# Altium PCB Test_PCB.PcbDoc
Units mil, origin at the board's own origin, x right, y up, seen from the top; angles counter-clockwise.
Board outline 3500 x 3975 mil, 2 copper layers (Top Layer, Bottom Layer); 44 components, 34 nets, 150 pads, 6 vias.
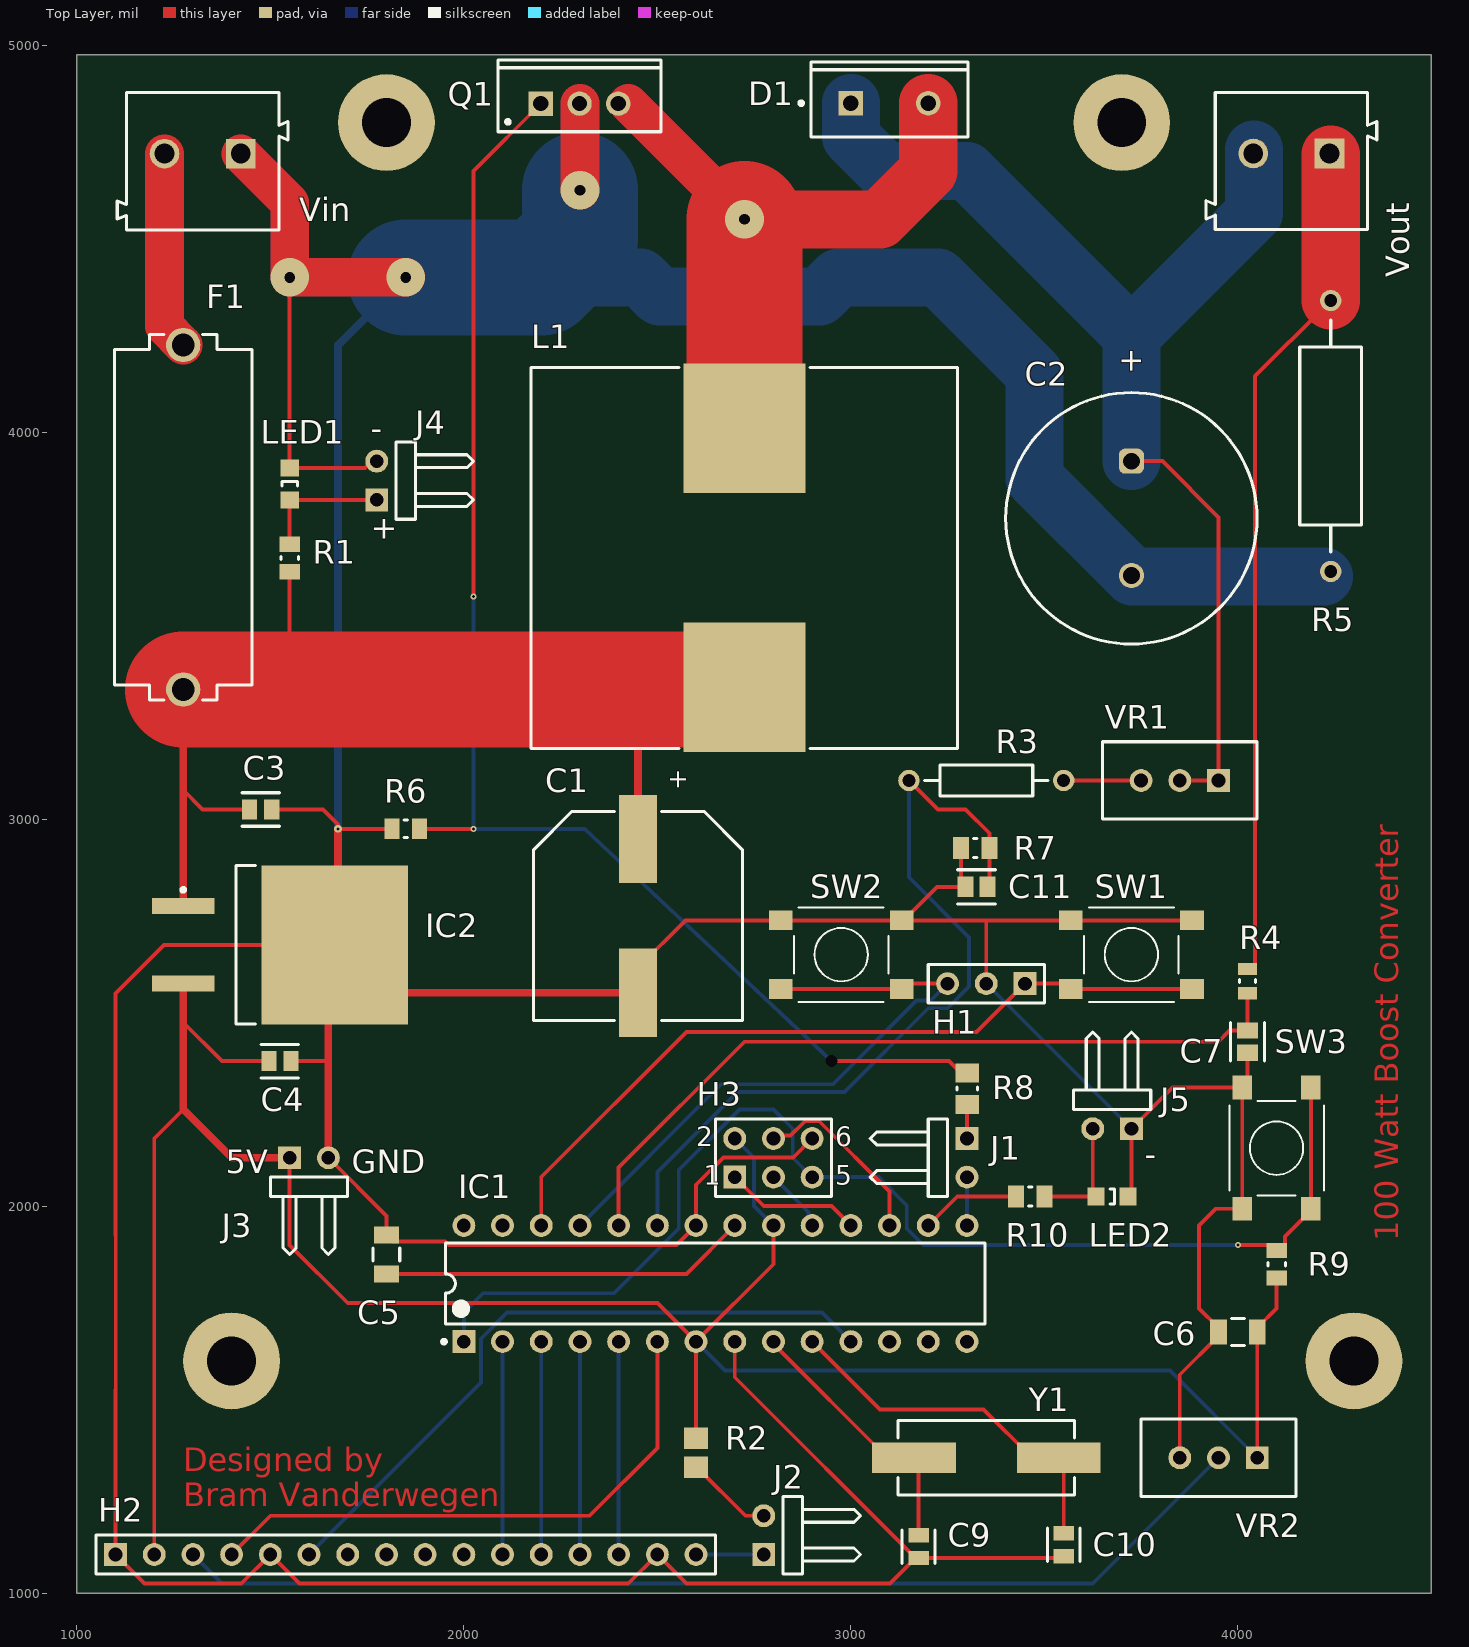
[diagram p0: Top Layer view]
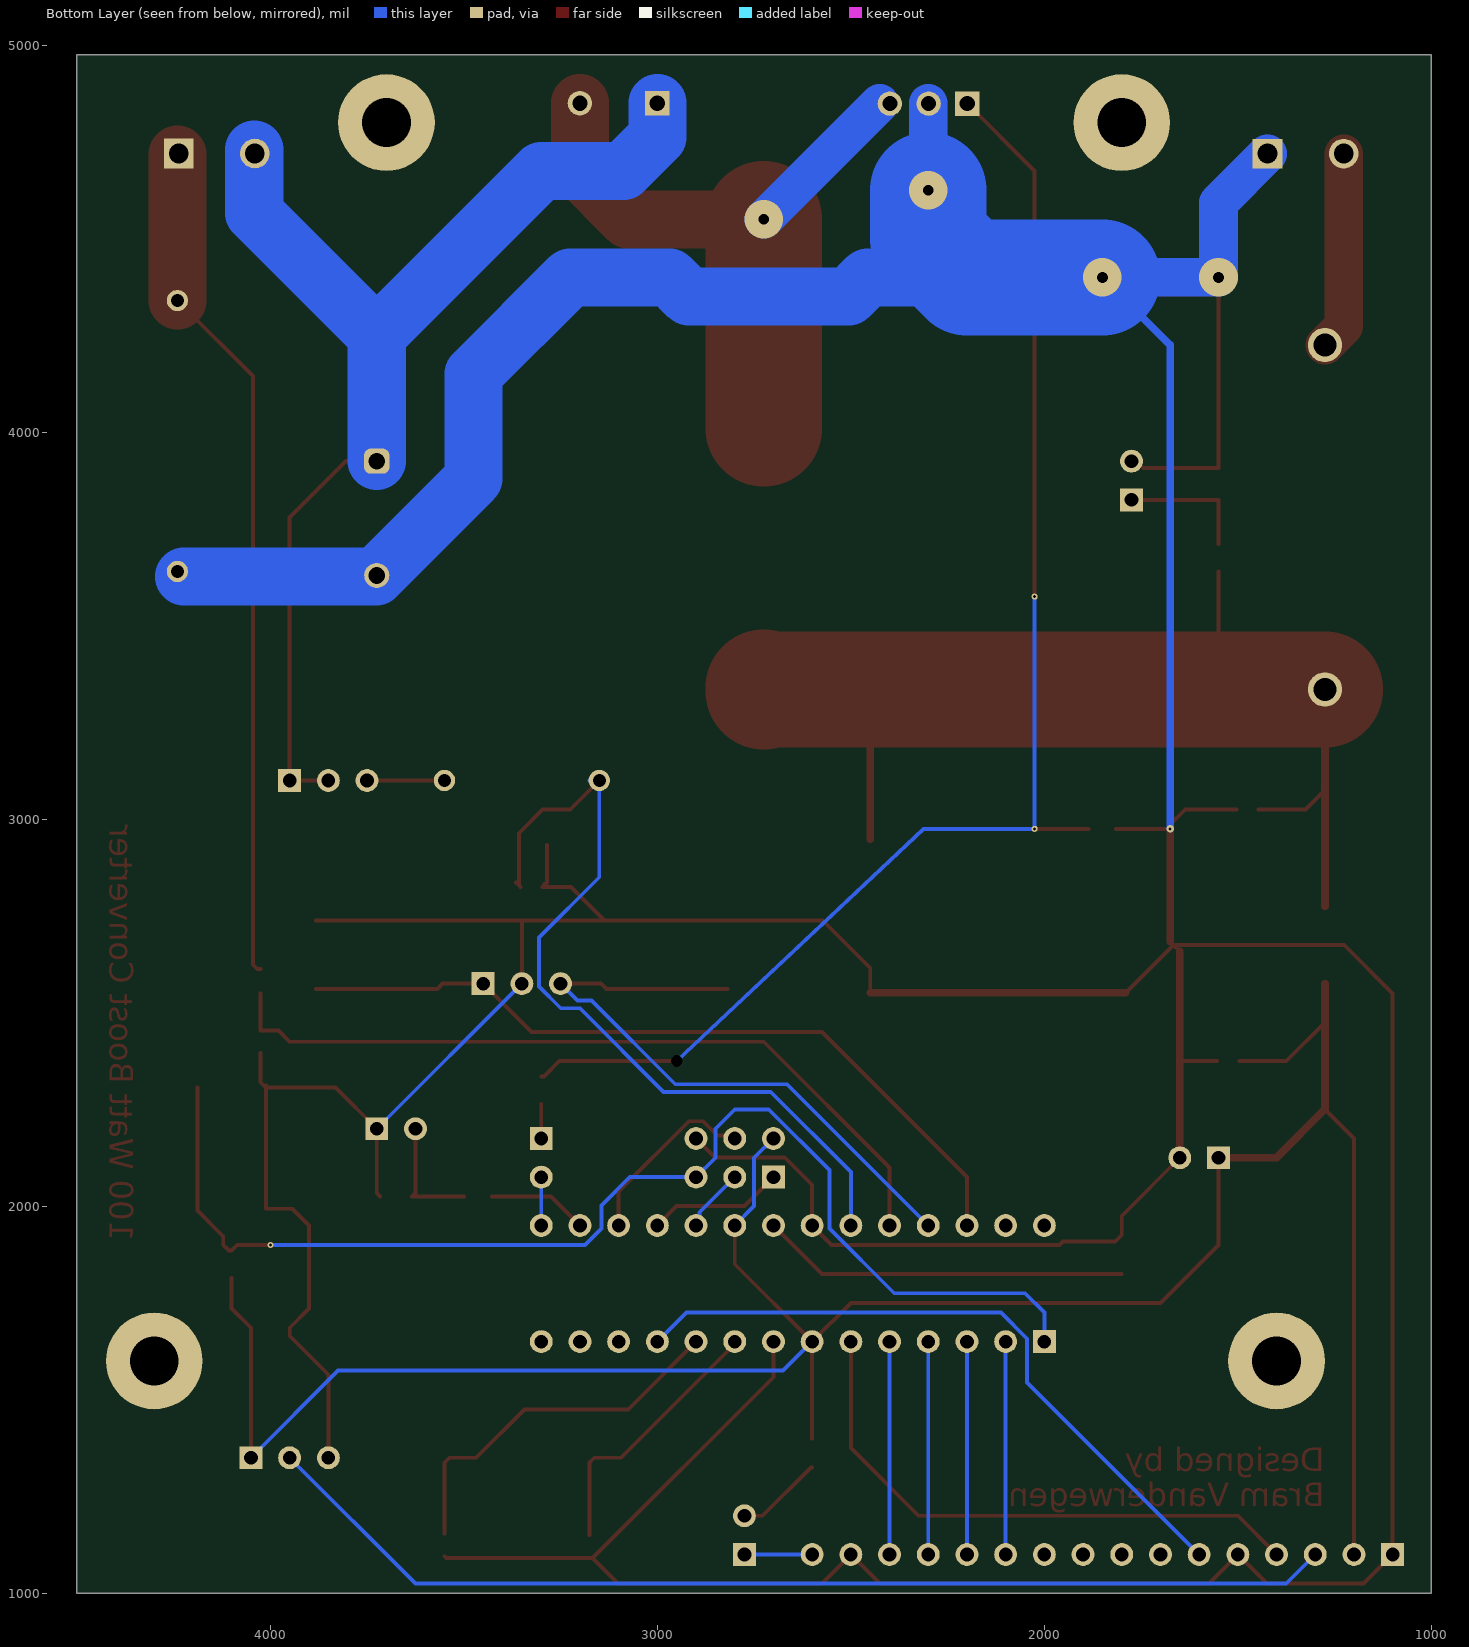
[diagram p1: Bottom Layer view, seen from below]
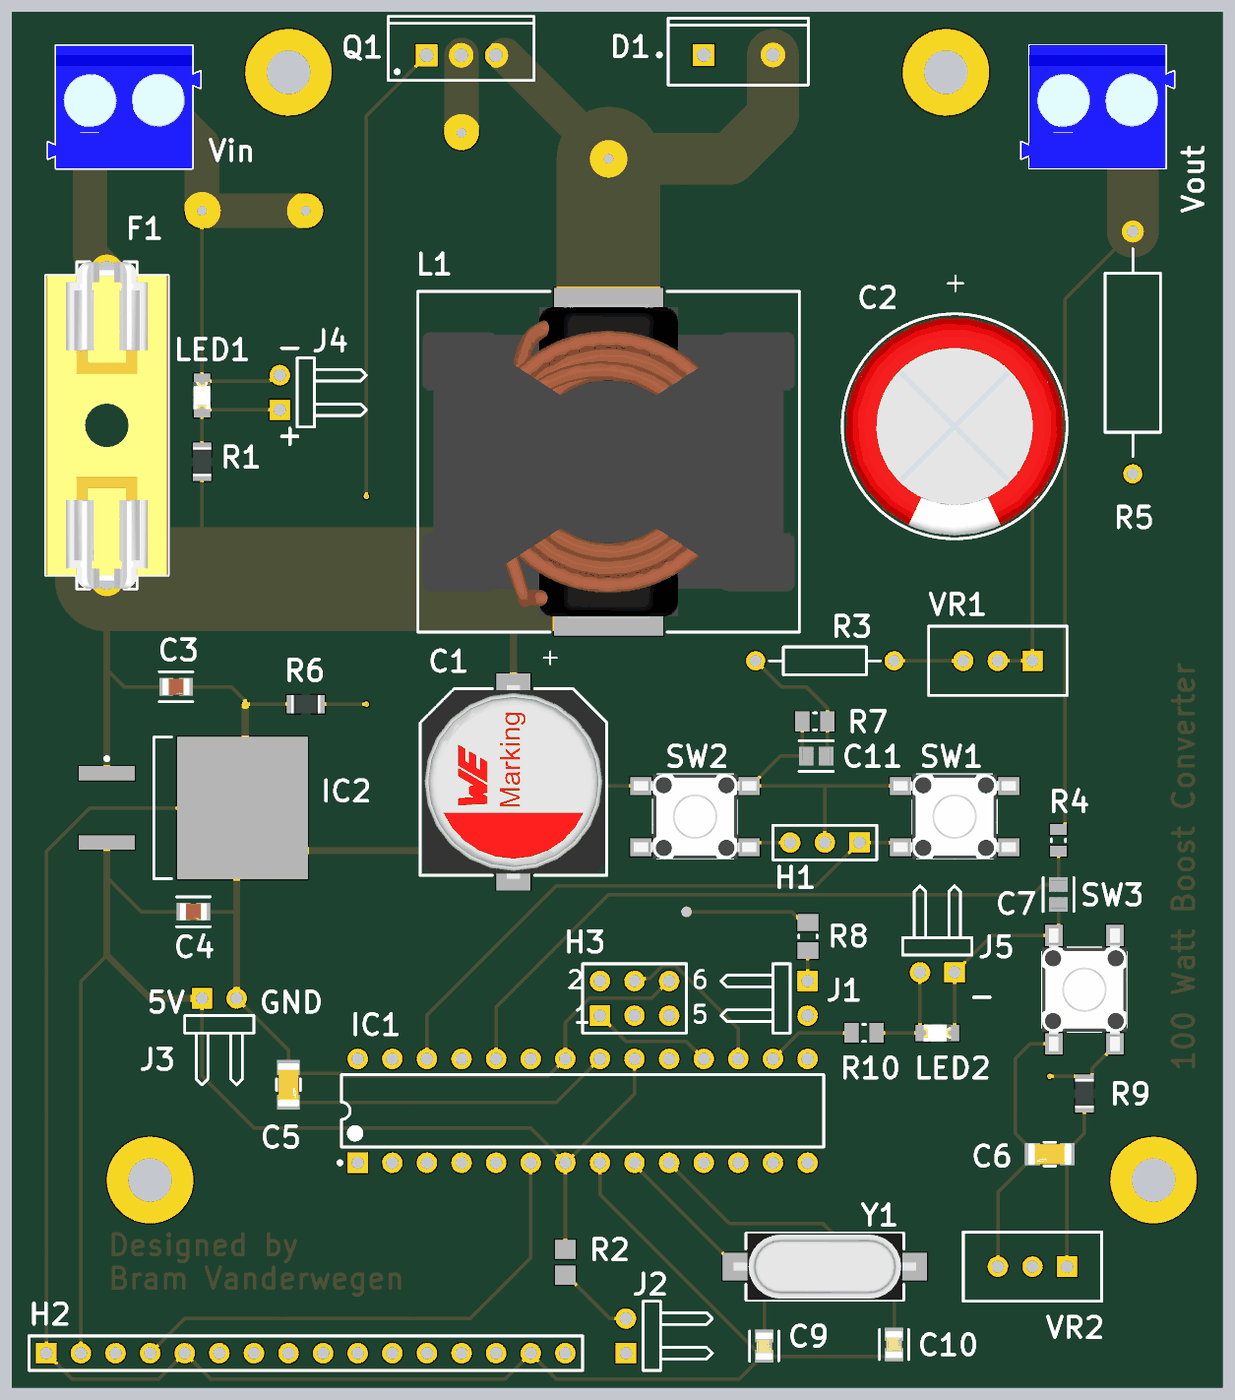
[diagram p2: 3D render of the assembled board from above, using the file's embedded part models]

## Layer stack, top to bottom
Top Solder: solder mask 0.4, Solder Resist, Dk 3.5
Top Layer: signal copper 1.4
Dielectric 1: dielectric 12.6, FR-4, Dk 4.8
Bottom Layer: signal copper 1.4
Bottom Solder: solder mask 0.4, Solder Resist, Dk 3.5

## Board outline
1000,4975 4500,4975 4500,1000 1000,1000

## Design rules (kind name [scope] priority, off if disabled: settings)
Clearance [All] p1: gap=10 ignorepadtopadclearanceinfootprint=FALSE except(0: Arc-Hole Track-Hole SMDPad-Hole THPad-Hole Via-Hole Fill-Hole Poly-Hole Region-Hole Text-Hole)
Height [All] p1: minheight=0 maxheight=10000 prefheight=500
HoleSize [All] p1: absolutevalues=TRUE maxlimit=196.85 minlimit=1 maxpercent=80.000 minpercent=20.000
PolygonConnect [All] p1: connectstyle=Relief reliefconductorwidth=10 reliefentries=4 polygonreliefangle="90 Angle" airgapwidth=10
RoomDefinition Boost_Converter_1 [InComponentClass('Boost_Converter_1')] p1: confinementstyle=ConfineIn formatcopy=TRUE lockcomponents=FALSE outline 7016.42,1266.5 19261.42,1266.5 19261.42,2986.5 7016.42,2986.5
RoutingVias [All] p1: holewidth=28 width=50 viastyle="Through Hole" minholewidth=7.87 minwidth=15.75 maxholewidth=196.85 maxwidth=393.7
ShortCircuit [All] p1: allowed=TRUE
SolderMaskExpansion [All] p1: expansion=4 istentingtop=FALSE
Width [All] p1: maxlimit=300 minlimit=10 preferedwidth=10 minimp=50.000000 maximp=50.000000 favimp=50.000000
27 further rules are at their usual default settings.

## Components (designator, comment, footprint, x,y, rotation, side; value= is the part's Value field where it differs from the comment)
C1 "1000uF, 25V" WCAP-ASLI_D12.5H14 2450,2750 r90 top
C2 "1000uF, 63V" WCAP-ATG5_D16H31.5 3725,3777.36 r90 top
C3 "100nF 50V" FP-GCD21B-0_15-IPC_C 1475,3025 r0 top
C4 "100nF 50V" FP-GCD21B-0_15-IPC_C 1525,2375 r0 top
C5 "100nF 50V" FP-CL31-IPC_C 1800,1875.25 r270 top
C6 "100nF 50V" FP-CL31-IPC_C 4000,1675 r180 top
C7 "10nF 50V" FP-CL21-IPC_C 4025,2425 r270 top
C9 "22pF" FP-C0805C-DN-MFG 3175,1120.47 r270 top value="22 pF"
C10 "22pF" FP-C0805C-DN-MFG 3550,1125 r270 top value="22 pF"
C11 "10nF 50V" FP-CL21-IPC_C 3325,2825 r180 top
D1 "MBR10100G" ONSC-TO-220-2-221B-04_E 3100,4850 r90 top
F1 "696101000002" 696101000002 1275,3780.12 r270 top
H1 "Header 3" HDR1X3 3450,2575 r180 top
H2 "Header 16" HDR1X16 1100,1100 r0 top
H3 "Header 3X2" HDR2X3 2700,2075 r0 top
IC1 "ATmega8-16PU" 28P3 2650,1800 r90 top
IC2 "L7805CD2T-TR" TO-263_M 1525,2675 r0 top
J1 "Jumper" HDR1X2H 3300,2175 r270 top
J2 "Jumper" HDR1X2H 2775,1100 r90 top
J3 "Jumper" HDR1X2H 1550,2125 r0 top
J4 "Jumper" HDR1X2H 1775,3825 r90 top
J5 "Jumper" HDR1X2H 3725,2200 r180 top
L1 "100uH, 11.2A" WE-HCF_2920 2725,3675 r0 top
LED1 "Green" 0805_A 1550,3866.34 r270 top
LED2 "Super Red" 0805_A 3675,2025 r180 top
Q1 "IRL540NPbF" TO-220AB 2299,4849 r0 top
R1 "10kΩ" RESC2013X60X35NL10T20 1550,3675 r270 top
R2 "4.7kOhm" RESC2013X60X40ML20T25 2600,1362.6 r90 top
R3 "43K Ohm" AXIAL-0.4 3350,3100 r180 top value=43K
R4 "1.5k" RESC2013X60X35LL10T20 4025,2581.5 r270 top
R5 "0.22Ω 5W" AXIAL-0.7 4240,3990 r90 top value=0.22Ω
R6 "10k" RESC2013X60X35NL10T20 1850,2975 r0 top
R7 "2.7k" RESC2013X50X30NL20T20 3321.43,2925 r0 top
R8 "RK73B2ATTD100J" RESC2013X60X30ML20T20 3301,2303.65 r270 top
R9 "10 kOhm" RESC2013X60X35NL10T20 4100,1850 r270 top
R10 "2.7k" RESC2013X50X30NL20T20 3463.58,2025 r180 top
SW1 "430182070816" 430182070816 3725,2650 r0 top
SW2 "430182070816" 430182070816 2975,2650 r0 top
SW3 "430182070816" 430182070816 4100,2150 r270 top
Vin "691101710002" 691101710002 1325,4700 r180 top
Vout "691101710002" 691101710002 4138.42,4700.31 r180 top
VR1 "10kΩ" 10k_trimmer 3850,3100 r180 top
VR2 "10kΩ" 10k_trimmer 3950,1350 r180 top
Y1 "16MHz" WE-XTAL_HC49/4HSMX 3350,1350 r0 top

## Footprints (in the part's own frame and the unit in brackets; to place one, negate y for a bottom-side part, rotate by r counter-clockwise, add the part's x,y. Pads: shape width x height; smd on the part's side, far side on the other; paste and mask are expansions set on the pad)
10k_trimmer [mm]
  rect 1.5x1.5 hole 0.9: 1(-2.54,0)
  round 1.5 hole 0.9: 2(0,0) 3(2.54,0)
  silkscreen extent -5.08,-2.54 5.08,2.54
28P3 [mm] "28-Pin Plastic Dual In-Line Package (PDIP)"
  rect 1.5x1.5 hole 0.9: 1(-3.81,16.51)
  round 1.5 hole 0.9: 2(-3.81,13.97) 3(-3.81,11.43) 4(-3.81,8.89) 5(-3.81,6.35) 6(-3.81,3.81) 7(-3.81,1.27) 8(-3.81,-1.27) 9(-3.81,-3.81) 10(-3.81,-6.35) 11(-3.81,-8.89) 12(-3.81,-11.43) 13(-3.81,-13.97) 14(-3.81,-16.51) 15(3.81,-16.51) 16(3.81,-13.97) 17(3.81,-11.43) 18(3.81,-8.89) 19(3.81,-6.35) 20(3.81,-3.81) 21(3.81,-1.27) 22(3.81,1.27) 23(3.81,3.81) 24(3.81,6.35) 25(3.81,8.89) 26(3.81,11.43) 27(3.81,13.97) 28(3.81,16.51)
  silkscreen extent -3.93,-17.7 2.65,17.93, body extent -3.6,-17.65 3.6,17.65, height 4.58
0805_A [mm] "Chip LED, 2-Leads, Body 2.0x1.3mm, IPC Medium Density"
  rect 1.1x1.2 smd: 1(-1.05,0) 2(1.05,0)
  silkscreen extent -0.15,-0.5 0.15,0.5, body extent -1,-0.62 1,0.63, height 0.68
430182070816 [mm] "6*6mm vertical type, SMD, height 7.0mm, black actuator, 160gf, T&R"
  rect 1.55x1.3 smd: 1(-3.975,2.25) 2(-3.975,-2.25) 3(3.975,2.25) 4(3.975,-2.25)
  silkscreen extent -3.1,-3.1 3.1,3.1, body extent -4.5,-3.1 4.5,3.1, height 6.99
691101710002 [mm] "5,00mm - modular - blue - Horizontal entry with pressure clamp - 12,6mm height - 02p"
  rect 1.95x1.95 hole 1.3: 1(-2.5,-0.5)
  round 1.95 hole 1.3: 2(2.5,-0.5)
  silkscreen extent -5.6,-4.5 5.6,4.5, body extent -5.6,-4.5 5.6,4.5, height 12.65
696101000002 [mm] "FUSEHOLDER BLOCKS - PCB - CLIP COVER - THT"
  round 2.25 hole 1.5: 1(-11.3,0) 2(11.3,0)
  silkscreen extent -12,-4.5 12,4.5, body extent -12,-4.5 12,4.5, height 13.55
AXIAL-0.4 [mm] "Axial Device, Thru-Hole; 2 Leads; 0.4 in Pin Spacing"
  round 1.4 hole 0.85: 1(-5.08,0) 2(5.08,0)
  silkscreen extent -4.06,-1.02 4.06,1.02
AXIAL-0.7 [mm] "Axial Device, Thru-Hole; 2 Leads; 0.7 in Pin Spacing"
  round 1.4 hole 0.85: 1(-8.89,0) 2(8.89,0)
  silkscreen extent -7.62,-2.03 7.62,2.03
FP-C0805C-DN-MFG [mm]
  rect 0.95x1.35 smd paste+0 mask+0: 1(-0.75,0) 2(0.75,0)
  silkscreen extent -1.1,-1.07 1.1,1.07, body extent -1.4,-0.85 1.4,0.85, height 0.25
FP-CL21-IPC_C [mil]
  rect 41.52x53.39 smd paste+0 mask+0: 1(-28.57,0) 2(28.57,0)
  silkscreen extent -49,-44 49,44, body extent -53,-32 53,32, height 10
FP-CL31-IPC_C [mil]
  rect 43.52x65.28 smd paste+0 mask+0: 1(-50.25,0) 2(50.25,0)
  silkscreen extent -17,-34 17,34, body extent -76,-38 76,38, height 10
FP-GCD21B-0_15-IPC_C [mil]
  rect 39.6x51.5 smd paste+0 mask+0: 1(-28.59,0) 2(28.59,0)
  silkscreen extent -48,-43 48,43, body extent -52,-31 52,31, height 10
HDR1X2H [mm] "Connector; Header; 2 Position; Right Angle"
  rect 1.5x1.5 hole 0.9: 1(0,0)
  round 1.5 hole 0.9: 2(2.54,0)
  silkscreen extent -1.27,-6.35 3.81,-1.27
HDR1X3 [mm] "Connector; Header; 3 Position"
  rect 1.5x1.5 hole 0.9: 1(0,0)
  round 1.5 hole 0.9: 2(2.54,0) 3(5.08,0)
  silkscreen extent -1.27,-1.27 6.35,1.27
HDR1X16 [mm] "Connector; Header; 16 Position"
  rect 1.5x1.5 hole 0.9: 1(0,0)
  round 1.5 hole 0.9: 2(2.54,0) 3(5.08,0) 4(7.62,0) 5(10.16,0) 6(12.7,0) 7(15.24,0) 8(17.78,0) 9(20.32,0) 10(22.86,0) 11(25.4,0) 12(27.94,0) 13(30.48,0) 14(33.02,0) 15(35.56,0) 16(38.1,0)
  silkscreen extent -1.27,-1.27 39.37,1.27
HDR2X3 [mm] "Connector; Header; 3x2 Position"
  rect 1.5x1.5 hole 0.9: 1(0,0)
  round 1.5 hole 0.9: 2(0,2.54) 3(2.54,0) 4(2.54,2.54) 5(5.08,0) 6(5.08,2.54)
  silkscreen extent -1.27,-1.27 6.35,3.81
ONSC-TO-220-2-221B-04_E [mm] "FM, 2-Leads, Body 10.3x4.85mm, Pitch 5.08mm"
  rect 1.6x1.6 hole 1: 1(0,2.54)
  round 1.6 hole 1: 3(0,-2.54)
  silkscreen extent -2.2,-5.15 2.69,5.92, body extent -2.18,-5.15 2.67,5.15, height 19.05
RESC2013X50X30NL20T20 [mm] "Chip Resistor, 2-Leads, Body 2.00x1.25mm, IPC Medium Density"
  rect 1.05x1.45 smd: 1(-0.925,0) 2(0.925,0)
  silkscreen extent -0.1,-0.62 0.1,0.62, body extent -1.1,-0.72 1.1,0.72, height 0.5
RESC2013X60X30ML20T20 [mm] "Chip Resistor, 2-Leads, Body 2.00x1.25mm, IPC Low Density"
  rect 1.25x1.55 smd: 1(-1.025,0) 2(1.025,0)
  silkscreen extent -0.1,-0.67 0.1,0.67, body extent -1.1,-0.72 1.1,0.72, height 0.6
RESC2013X60X35LL10T20 [mm] "Chip Resistor, 2-Leads, Body 2.00x1.25mm, IPC High Density"
  rect 0.8x1.25 smd: 1(-0.8,0) 2(0.8,0)
  silkscreen extent -0.1,-0.53 0.1,0.53, body extent -1.05,-0.67 1.05,0.67, height 0.6
RESC2013X60X35NL10T20 [mm] "Chip Resistor, 2-Leads, Body 2.1x1.35mm, IPC Medium Density"
  rect 1x1.35 smd: 1(-0.9,0) 2(0.9,0)
  silkscreen extent -0.1,-0.58 0.1,0.58, body extent -1.05,-0.68 1.05,0.67, height 0.6
RESC2013X60X40ML20T25 [mm] "Chip Resistor, 2-Leads, Body 2.00x1.25mm, IPC Low Density"
  rect 1.4x1.55 smd: 1(-0.95,0) 2(0.95,0)
  body extent -1.1,-0.72 1.1,0.72, height 0.6
TO-220AB [mm] "TO, Thru-Hole, Vertical, Heatsink Mounted; 3 In-Line Leads; Pitch 2.54 mm"
  rect 1.6x1.6 hole 1: 1(-2.54,0)
  round 1.6 hole 1: 2(0,0) 3(2.54,0)
  silkscreen extent -5.35,-1.85 5.35,2.85, body extent -5.4,-1.9 5.4,2.9, height 19.3
TO-263_M [mm] "D2-PAK, 4-Leads, Body 9.2x10.2mm, Pitch 2.54mm, Lead Span 15.4mm, IPC Low Density"
  rect 4.1x1.05 smd: 1(-6.35,2.54) 3(-6.35,-2.54)
  rect 9.6x10.45 smd: 4(3.6,0)
  silkscreen extent -6.47,-5.2 -1.6,5.2, body extent -2.9,-5.2 6.45,5.2, height 4.6
WCAP-ASLI_D12.5H14 [mm] "Aluminium Electrolytic V-Chip SMT Capacitors, 12.5x14mm"
  rect 5.8x2.5 smd: 1(5.05,0) 2(-5.05,0)
  silkscreen extent -6.85,-6.85 6.85,6.85, body extent -7.1,-6.72 7.1,6.73, height 14
WCAP-ATG5_D16H31.5 [mm] "Aluminum Electrolytic Capacitors, 16x31.5mm"
  rrect50% 1.65x1.65 hole 1.1: 1(3.75,0)
  round 1.65 hole 1.1: 2(-3.75,0)
  silkscreen extent -8.25,-8.25 8.25,8.25, body extent -7.99,-8 8,8, height 31.81
WE-HCF_2920 [mm] "SMD High Current Inductor, body 28x25mm"
  rect 8x8.5 smd: 1(0,8.5) 2(0,-8.5)
  silkscreen extent -14,-12.5 14,12.5, body extent -13.65,-11.55 13.65,11.55, height 20
WE-XTAL_HC49/4HSMX [mm] "Quartz Crystal, size HC49/4HSMX, body 11.4x4.9mm"
  rect 5.5x2 smd: 1(-4.75,0) 2(4.75,0)
  silkscreen extent -5.8,-2.45 5.8,2.45, body extent -6.7,-2.45 6.7,2.45, height 4.3

## Part data
C1: library part 865080462016, "WCAP-ASLI Aluminum Electrolytic Capacitor, V-Chip, SMT, D12.5xH14mm, 1000uF, 25V", Capacitance=1000uF, Capacitance Tolerance=+/-20%, Leakage Current=250uA, Manufacturer="Wurth Elektronik", Operating Temperature="-55 to +105degC", Rated Voltage=25VDC, Ripple Current=1100mA, Supplier Part Number 1=732-8444-1-ND, ComponentLink1Description=Manufacturer, ComponentLink1URL=http://www.we-online.de, ComponentLink2Description=Datasheet, ComponentLink2URL=https://www.we-online.com/catalog/datasheet/865080462016.pdf, Diameter=12.5mm, Dissipation Factor=14%, Endurance=2000h, Height=14mm, Manufacturer Part Number=865080462016, Mounting Technology=SMT, Packaging="Tape and Reel", Published Date="October 2020", Supplier 1=Digi-Key, Technical Reference=ASEH140102M025DVCTGB000
C2: library part 860020780025, "CAP ALUM 1000UF 20% 63V RADIAL", Capacitance=1000uF, Capacitance Tolerance=+/-20%, Case/Package=Radial, Leakage Current=630uA, Manufacturer="Wurth Elektronik", Max Operating Temperature=105°C, Min Operating Temperature=-40°C, Operating Temperature="-40 to +105degC", Package Quantity=250, Rated Voltage=63VDC, Ripple Current=1185mA, Supplier Part Number 1=732-8986-1-ND, Tolerance=20%, Voltage Rating=63V, Category="Aluminum Electrolytic Capacitors", ComponentLink1Description=Manufacturer, ComponentLink1URL=http://www.we-online.de, ComponentLink2Description=Datasheet, ComponentLink2URL=https://www.we-online.com/catalog/datasheet/860020780025.pdf, ComponentLink3Description=http://www.farnell.com/datasheets/1879699.pdf?src-supplier=Farnell, ComponentLink3URL=http://www.farnell.com/datasheets/1879699.pdf?src-supplier=Farnell, ComponentLink4Description=https://katalog.we-online.de/pbs/datasheet/860020780025.pdf?src-supplier=Digi-Key, ComponentLink4URL=https://katalog.we-online.de/pbs/datasheet/860020780025.pdf?src-supplier=Digi-Key, ComponentLink5Description=http://www.farnell.com/datasheets/1879699.pdf?src-supplier=Element14, ComponentLink5URL=http://www.farnell.com/datasheets/1879699.pdf?src-supplier=Element14, ComponentLink6Description=http://katalog.we-online.de/pbs/datasheet/860020780025.pdf?src-supplier=Digi-Key, ComponentLink6URL=http://katalog.we-online.de/pbs/datasheet/860020780025.pdf?src-supplier=Digi-Key, Diameter=16mm, Dissipation Factor=9%, Endurance=2000h, Height=31.5mm, Height - Seated (Max)=1.299inch, Lead Pitch=0.295inch, Life (Hours)=2000Hour, Manufacturer Part Number=860020780025, Mount="Through Hole", Mounting Technology=THT, Packaging="Ammo Pack", Polarity=Polar, Pricing 1="1=2,37000, 50=2,01700, 100=1,75700 (USD)", Published Date="October 2020", REACH SVHC=Unknown, RoHS=Yes, RoHS Compliant=Yes, Stock 1=70, Supplier 1=Digi-Key, Technical Reference=ATDK315102M063DSPADB000, Voltage Rating (DC)=63V
C3 C4: library part CMP-06035-045527-1, "Chip Multilayer Ceramic Capacitors for Automotive, 0805, 0.10uF, X7R, 15%, 10%, 50V, Grade 1", Capacitance=100nF, Case Code (Imperial)=0805, Case Code (Metric)=2012, Dielectric=X7R, Max Operating Temperature=125°C, Min Operating Temperature=-55°C, Package Quantity=3000, Ratings=AEC-Q200, Tolerance=10%, Voltage Rating=50V, Case/Package=0805, Depth=1.25mm, Height=1.25mm, Length=2mm, Mount="Surface Mount", Packaging="Tape and Reel", Termination=SMD/SMT, Thickness=0.049inch, Voltage Rating (DC)=50V, Weight=0.000335oz, Width=0.049inch
C5 C6: library part CMP-13271-001731-1, "Cap Ceramic 100nF 50V X7R ±10% SMD 1206 +125°C Embossed T/R", Capacitance=100nF, Case/Package=1206, Dielectric=X7R, Max Operating Temperature=125°C, Min Operating Temperature=-55°C, Package Quantity=15000, Tolerance=10%, Voltage=50V, Depth=1.6mm, Height=0.85mm, Lead Free="Lead Free", Length=3.2mm, Mount="Surface Mount", Packaging="Tape and Reel", Radiation Hardening=No, Thickness=0.037inch, Voltage Rating=50V, Voltage Rating (DC)=50V, Width=0.063inch
C7 C11: library part CMP-13271-002413-1, "CL21 Series 0805 10nF 50V ±10% Tolerance X7R Multilayer Ceramic Chip Capacitor", Capacitance=10nF, Case Code (Imperial)=0805, Case Code (Metric)=2012, Dielectric=X7R, Max Operating Temperature=125°C, Min Operating Temperature=-55°C, Package Quantity=1, Tolerance=10%, Voltage Rating=50V, Case/Package=0805, Contact Plating=Tin, Depth=1.25mm, Height=0.65mm, Lead Free="Lead Free", Length=0.079inch, Mount="Surface Mount", Packaging="Tape and Reel", Radiation Hardening=No, Thickness=0.03inch, Width=0.049inch
C9 C10: library part CMP-03020-018552-1, "CAP CER 22PF 50V C0G/NP0 0805", Capacitance="22 pF", Manufacturer=KEMET, Manufacturer Part Number=C0805C220J5GAC7210, Package=C0805C-DN, Temperature="-55°C to +125°C", Temperature Characteristic=C0G, Temperature Coefficient=30ppm/°C, Temperature Range High=+125°C, Temperature Range Low=-55°C, Tolerance=0.05, Voltage Rating="50 V", Automotive=No, Category=Cap, ComponentLink2Description=Datasheet, ComponentLink2URL=https://content.kemet.com/datasheets/KEM_C1003_C0G_SMD.pdf, Device Class L1="Passive Components", Device Class L2=Capacitors, Device Class L3="Ceramic Capacitors", Digikey Description="CAP CER 22PF 50V C0G/NP0 0805", Height=0.88mm, Ipc Land Pattern Name=CAPC200125X78, Lead Free=Yes, Material=Ceramic, Octopart=https://octopart.com/c0805c220j5gac7210-kemet-3882539, RoHS=TRUE
D1: library part CMP-1055-00601-1, "SWITCHMODE(TM) Power Rectifier, 2-Pin TO-220, Pb-Free, Tube", Manufacturer="On Semiconductor", ComponentLink1Description="Manufacturer URL", ComponentLink1URL=http://www.onsemi.com/, ComponentLink2Description=Datasheet, ComponentLink2URL=http://www.onsemi.cn/pub_link/Collateral/MBR1080-D.PDF, ComponentLink3Description="Package Specification", ComponentLink3URL=http://www.onsemi.com/pub_link/Collateral/BYW29-D.PDF, Configuration=Single, DatasheetVersion="Rev. 1", IFSM Max (A)=150, Mounting Technology="Through Hole", PackageDescription="2-Pin Flange Mount, Vertical Straight Lead, Body 9.97 x 4.44 mm, Pitch 5.08 mm", PackageReference=TO-220-2-221B-04_E, PackageVersion="Rev. E", Packing=Tube, PartNumber=MBR10100G, RoHS=TRUE
F1: "WR-FSH Fuse Holder Blocks Fuse Holder Blocks Clip Cover for PCB", Operating Temperature="-30 to 120 degC", ComponentLink1Description=Manufacturer, ComponentLink1URL=http://www.we-online.de, ComponentLink2Description=Datasheet, ComponentLink2URL=https://katalog.we-online.de/em/datasheet/696101000002.pdf, Fuse Size="5x20 mm", Mounting Technology=THT, Packaging=Box, Part Number=696101000002, Published Date="August 2018", Publisher="Wurth Elektronik"
H1: "Header, 3-Pin", LatestRevisionDate=17-Jul-2002, LatestRevisionNote="Re-released for DXP Platform.", Publisher="Altium Limited"
H2: "Header, 16-Pin", LatestRevisionDate=17-Jul-2002, LatestRevisionNote="Re-released for DXP Platform.", Publisher="Altium Limited"
H3: "Header, 3-Pin, Dual row", LatestRevisionDate=17-Jul-2002, LatestRevisionNote="Re-released for DXP Platform.", Publisher="Altium Limited"
IC1: library part CMP-0095-00372-1, "8-bit AVR Microcontroller, 4.5-5.5V, 16MHz, 8KB Flash, 512 Bytes EEPROM, 1KB SRAM, 28-pin PDIP, Industrial Grade (-40°C to 85°C)", ComponentLink1Description="Manufacturer URL", ComponentLink1URL=http://www.atmel.com/, ComponentLink2Description=ATmega8(L), ComponentLink2URL=http://www.atmel.com/dyn/resources/prod_documents/doc2486.pdf, ComponentLink3Description="ATmega8(L) Summary", ComponentLink3URL=http://www.atmel.com/dyn/resources/prod_documents/2486S.pdf, DatasheetVersion="revZ, Feb-2011", PackageDescription="28-lead (0.300\"/7.62mm Wide) Plastic Dual Inline Package (PDIP)", PackageReference=28P3, PackageVersion="revB, Sep-2001"
IC2: library part CMP-0244-00213-1, "Positive Voltage Regulator, 3-Pin D2PAK, Tape and Reel", ComponentLink1Description="Manufacturer URL", ComponentLink1URL=http://www.st.com, ComponentLink2Description=Datasheet, ComponentLink2URL=http://www.st.com/internet/com/TECHNICAL_RESOURCES/TECHNICAL_LITERATURE/DATASHEET/CD00000444.pdf, DatasheetVersion=16/11/2011, PackageDescription="3-Pin Transistor Outline Package 2.54 mm Pitch, 15.4 mm Lead Span (D2PAK)", PackageReference=TO-263, PackageVersion=2011
J1 J2 J3 J4 J5: library part "Header 2H", "Header, 2-Pin, Right Angle", LatestRevisionDate=17-Jul-2002, LatestRevisionNote="Re-released for DXP Platform.", Publisher="Altium Limited"
L1: library part 74437529203101, "WE-HCF SMT High Current Inductor, size 2920, 100uH, 11.2A, 25.19mOhm", DC Resistance max.=25.19mOhm, DC Resistance typ.=22.9mOhm, Inductance=100uH, Manufacturer="Wurth Elektronik", Operating Temperature="-40 to +125degC", Rated Current=11.2A, Saturation Current=9.4A, Self Resonant Frequency=4.3MHz, Supplier Part Number 1=732-11715-ND, ComponentLink1Description=Manufacturer, ComponentLink1URL=http://www.we-online.de, ComponentLink2Description=Datasheet, ComponentLink2URL=https://www.we-online.com/catalog/datasheet/74437529203101.pdf, Manufacturer Part Number=74437529203101, Mounting Technology=SMT, Packaging="Tray and Carton", Published Date="September 2020", Size=2920, Supplier 1=Digi-Key
LED1: library part CMP-1426-00007-1, "SMD mono-color Chip LED, WL-SMCW, Green", Manufacturer="Wuerth Elektronik", PartNumber=150080GS75000, Color=Green, ComponentLink1Description="Manufacturer URL", ComponentLink1URL=http://www.we-online.com, ComponentLink2Description=Datasheet, ComponentLink2URL=http://katalog.we-online.com/led/datasheet/150080GS75000.pdf, PackageReference=0805_A
LED2: library part CMP-1426-00010-1, "SMD mono-color Chip LED, WL-SMCW, Super Red", Manufacturer="Wuerth Elektronik", PartNumber=150080SS75000, Color="Super Red", ComponentLink1Description="Manufacturer URL", ComponentLink1URL=http://www.we-online.com, ComponentLink2Description=Datasheet, ComponentLink2URL=http://katalog.we-online.com/led/datasheet/150080SS75000.pdf, PackageReference=0805_A
Q1: library part NMOS-2, "Trans MOSFET N-CH 100V 36A 3-Pin(3+Tab) TO-220AB", Case/Package=TO-220AB, Continuous Drain Current (ID)=36A, Drain to Source Breakdown Voltage=100V, Drain to Source Resistance=63mR, Drain-source On Resistance-Max=53mR, Gate to Source Voltage (Vgs)=16V, Input Capacitance=1.8nF, Manufacturer="International Rectifier", Manufacturer Part Number=IRL540NPBF, Max Operating Temperature=175°C, Max Power Dissipation=140W, Min Operating Temperature=-55°C, Package Quantity=50, Supplier Part Number 1=IRL540NPBF-ND, Category=MOSFETs, ComponentLink1Description="Manufacturer Link", ComponentLink1URL=http://www.irf.com/, ComponentLink2Description=https://datasheet.ciiva.com/7835/irl540npbf-7835764.pdf?src-supplier=Element14, ComponentLink2URL=https://datasheet.ciiva.com/7835/irl540npbf-7835764.pdf?src-supplier=Element14, ComponentLink3Description=https://datasheet.ciiva.com/14170/kkirl540n-data-e-14170372.pdf?src-supplier=Distrelec, ComponentLink3URL=https://datasheet.ciiva.com/14170/kkirl540n-data-e-14170372.pdf?src-supplier=Distrelec, ComponentLink4Description=https://datasheet.ciiva.com/29326/162798-da-01-en-irf-540n-29326742.pdf?src-supplier=Conrad, ComponentLink4URL=https://datasheet.ciiva.com/29326/162798-da-01-en-irf-540n-29326742.pdf?src-supplier=Conrad, ComponentLink5Description=https://datasheet.ciiva.com/6368/irl540npbf-6368261.pdf?src-supplier=Digi-Key, ComponentLink5URL=https://datasheet.ciiva.com/6368/irl540npbf-6368261.pdf?src-supplier=Digi-Key, ComponentLink6Description=https://datasheet.ciiva.com/16395/irl540npbf-16395612.pdf?src-supplier=Future+Electronics, ComponentLink6URL=https://datasheet.ciiva.com/16395/irl540npbf-16395612.pdf?src-supplier=Future+Electronics, Current Rating=36A, DatasheetVersion=PD-9.814, Drain to Source Voltage (Vdss)=100V, Dual Supply Voltage=100V, Element Configuration=Single, Fall Time=62ns, Height=8.77mm, LatestRevisionDate=17-Jul-2002, LatestRevisionNote="Re-released for DXP Platform.", Lead Free="Lead Free", Lead Pitch=2.54mm, Length=10.54mm, Mount="Through Hole", Nominal Vgs=2V, Note="Pin 2 is electrically connected to pin 4.", Number of Elements=1, Number of Pins=3, On-State Resistance=53mR, PackageDescription="TO, Thru-Hole, Vertical, Heatsink Mounted; 3 In-Line Leads; Pitch 2.54 mm", PackageReference=TO-220AB, PackageVersion=Feb-1997, Packaging=Rail/Tube, Power Dissipation=140W, Pricing 1="1=1,24000, 10=1,01100, 25=0,99200, 100=0,78610, 500=0,66628, 1000=0,54276, 2500=0,51094, 5000=0,49342 (USD)", Published=8-Jun-2000, Publisher="Altium Limited", Rds On Max=44mR, REACH SVHC="No SVHC", Recovery Time=290ns, Rise Time=81ns, RoHS=Yes, RoHS Compliant=Yes, Series=HEXFET®, Stock 1=6708, Supplier 1=Digi-Key, Termination="Through Hole", Turn-Off Delay Time=39ns, Turn-On Delay Time=11ns, Voltage Rating (DC)=100V, Width=4.69mm
R1 R6 R9: library part CMP-1659-00013-4, "Chip Resistor, 10 KOhm, +/- 1%, 0.125 W, -55 to 155 degC, 0805 (2012 Metric), RoHS, Tape and Reel", Manufacturer=Yageo, Max Operating Temperature="155 degC", Min Operating Temperature="-55 degC", Package Quantity=5000, Voltage Rating="150 V", ComponentLink1Description="Manufacturer URL", ComponentLink1URL=http://www.yageo.com/, ComponentLink2Description=Datasheet, ComponentLink2URL=http://www.yageo.com/documents/recent/PYu-RC_Group_51_RoHS_L_04.pdf, DatasheetVersion="Rev. 4, 02/2016", Height="0.5 mm", Length="2 mm", Mount="Surface Mount", Mounting Technology="Surface Mount", PackageDescription="2-Pin Surface Mounted Device, Body 2 x 1.25 mm", PackageReference=0805, Packaging="Tape and Reel", Pins=2, REACH SVHC="No SVHC", RoHSCompliant=true
R2: library part CMP-2001-00644-1, Manufacturer=Panasonic, Part Number=ERA6AEB472V
R3: library part Res2, "Res Metal Film 43K Ohm 1% 0.6W ±50ppm/C Conformal Coated AXL Ammo", Case/Package=Conformal, Manufacturer=Yageo, Manufacturer Part Number=MF0207FTE52-43K, Max Operating Temperature=155°C, Min Operating Temperature=-55°C, Resistance=43kR, Resistor Type="Metal Film", Supplier Part Number 1=MF0207FTE52-43K-ND, Temperature Coefficient=50ppm/°C, Tolerance=1%, Category="Through-Hole Resistors", ComponentLink1Description=http://components.arrow.com/part/dataview/0323_02063068?src-supplier=Arrow+Europe, ComponentLink1URL=http://components.arrow.com/part/dataview/0323_02063068?src-supplier=Arrow+Europe, ComponentLink2Description=https://www.distrelec.biz/Web/Downloads/_t/ds/MFxx_eng_tds.pdf?mime=application%2Fpdf&src-supplier=Distrelec, ComponentLink2URL=https://www.distrelec.biz/Web/Downloads/_t/ds/MFxx_eng_tds.pdf?mime=application%2Fpdf&src-supplier=Distrelec, ComponentLink3Description=http://www.yageo.com/documents/recent/Leaded-R_MF0_2011.pdf?src-supplier=Avnet+Europe, ComponentLink3URL=http://www.yageo.com/documents/recent/Leaded-R_MF0_2011.pdf?src-supplier=Avnet+Europe, ComponentLink4Description=http://www.yageo.com/documents/recent/Yageo%20LR_MF0_2013.pdf?src-supplier=Avnet, ComponentLink4URL=http://www.yageo.com/documents/recent/Yageo%20LR_MF0_2013.pdf?src-supplier=Avnet, Construction=Cylindrical, Contact Plating=Tin,Matte, Diameter=2.3mm, LatestRevisionDate=17-Jul-2002, LatestRevisionNote="Re-released for DXP Platform.", Length=6.3mm, Military Standard=Not, Mount="Through Hole", PackageDescription="Axial Device, Thru-Hole; 2 Leads; 0.4 in Pin Spacing", PackageReference=AXIAL-0.4, Packaging="Ammo Pack", Pricing 1="5000=0,01445 (USD)", Published=8-Jun-2000, Publisher="Altium Limited", Radiation Hardening=No, RoHS=Yes, RoHS Compliant=Yes, Supplier 1=Digi-Key, Termination=Axial
R4: library part CMP-2001-04524-1, Manufacturer=Yageo, Part Number=RC0805JR-131K5L
R5: library part Res2, "Resistor", Supplier Part Number 1=CA5100R2200JR05, LatestRevisionDate=17-Jul-2002, LatestRevisionNote="Re-released for DXP Platform.", PackageDescription="Axial Device, Thru-Hole; 2 Leads; 0.4 in Pin Spacing", PackageReference=AXIAL-0.4, Published=8-Jun-2000, Publisher="Altium Limited", Supplier 1="Arrow Electronics"
R7 R10: library part CMP-2001-03776-1, Manufacturer="Vishay Dale", Part Number=CRCW08052K70JNEA
R8: library part CMP-2001-04579-1, Manufacturer="KOA Speer", Part Number=RK73B2ATTD100J
SW1 SW2 SW3: library part CMP-1452-00015-1, "WS-TASV SMD Tact Switch 6X6 mm", Manufacturer="Wuerth Elektronik", ComponentLink1Description="Manufacturer URL", ComponentLink1URL=http://www.we-online.com, ComponentLink2Description=Datasheet, ComponentLink2URL=http://katalog.we-online.de/em/datasheet/4301x2.pdf, NoPins=04, PackageReference=430182070816, PartNumber=430182070816
Vin Vout: library part CMP-1502-03256-1, "Series 101 - 5.00 mm Horizontal Entry Modular with Pressure Clamp WR-TBL, 2 pin", Manufacturer="Wurth Elektronik", Operating Temperature=-40to105degC, Datasheet URL=http://katalog.we-online.de/em/datasheet/6911017100xx.pdf, Manufacturer URL=http://www.we-online.de, Mounting Technology=THT, Package Reference=691101710002, Packaging=Box, Part Number=691101710002, Pin Number=2, Pitch=5.00mm, Publisher=WurthElektronik
VR1 VR2: library part CMP-2000-05078-1, "Square Trimming Potentiometer, 10 KOhm, 500 mW, -55 to 125 degC, 3-Pin THD, RoHS, Tube", Manufacturer=Bourns, Manufacturer Part Number=3299W-1-103LF, Operating Temperature Range=-55Cto+125C, Package Description="3-Pin Surface Mount Device, Body 9.53 x 6.1 mm, Pitch 2.54 mm", Package Reference=3299W, Power Rating=500mW(1/2W), Resistance=10kOhms, Temperature Coefficient=100PPM/C, Tolerance=10%, Voltage Rating=300V, Adjustment=TopCrossed, Brand=Bourns, Datasheet URL=https://datasheet.ciiva.com/19482/769696-19482212.pdf, Datasheet Version=Sep-04, Element Type=Cermet, Length=10.03mm, Manufacturer URL=http://www.bourns.com/, Mounting=PanelMount, Packaging=Tube, Product=Multiturn, Product Category=TrimmerResistors-ThroughHole, Product Type=SquareTrimmingPotentiometer, Qualification=Commercial, RoHS=True, Series=3299, Taper=Linear, Termination Style=Pin, Tradename=Trimpot, Type=Trimmers, Unit Weight=0.035000oz, Width=9.53mm
Y1: library part 830051235, "WE-XTAL Quartz Crystal, SMT, HC49/4HSMX, 16MHz, +/-30ppm", Frequency Stability=+/-50ppm, Frequency Tolerance=+/-30ppm, Load Capacitance=18pF, Manufacturer="Wurth Elektronik", Operating Temperature="-40 to +85degC", ComponentLink1Description=Manufacturer, ComponentLink1URL=http://www.we-online.de, ComponentLink2Description=Datasheet, ComponentLink2URL=https://katalog.we-online.com/pbs/datasheet/830051235.pdf, Frequency=16MHz, Manufacturer Part Number=830051235, Mounting Technology=SMT, Packaging="Tape and Reel", Published Date="July 2020", Size=HC49/4HSMX

## Free pads (board coordinates)
  round 15.75 hole 7.87: 10(2025,3575) 11(2025,2975)
  round 10 hole 30: 13(2950,2375)
  round 250 hole 126: 14(1800,4800) 15(4300,1600) 16(1400,1600) 17(3700,4800)

## Via types
v1: diameter 100, hole 28, Top Layer to Bottom Layer, 4 vias
v2: diameter 15.75, hole 7.87, Top Layer to Bottom Layer, 1 vias
v3: diameter 20, hole 7.87, Top Layer to Bottom Layer, 1 vias

## Nets (pads, with @x,y where several pads share a name; then routed paths per layer and width w, separated by ;. In a path a pad name is that pad's centre, name@x,y a point inside that pad or via, vN(x,y) a via of type N, cw(c..) or ccw(c..) an arc to the next point about the centre after c; other vN are vias at no path point)
GND: C1.2 C2.2 C3.2 C4.2 C5.1 C6.2 C7.2 C9.2 C10.2 C11.2 H1.2 H2.1 H2.5 H2.15 H3.6 IC1.8 IC1.22 IC2.4 J3.2 J4.2 J5.1 LED1.1 LED2.1 Q1.2 R5.1 R6.1 R7.1 SW1.1 SW1.3 SW2.1 SW2.3 SW3.2 SW3.4 Vin.1 VR2.3 | length 20594.8
  Top Layer w10: C3.2 1635.82,3025 1675,2985.82 v3(1675,2975) R6.1 ; v1(1550,4400) LED1.1 1744.4,3907.68 1761.73,3925 J4.2 ; C4.2 1650,2375 ; J3.2 1800,1975 C5.1 1816.76,1908.74 1952.14,1908.74 1960.88,1900 2550,1900 IC1.22 2600,2055.27 2670.8,2126.07 2851.07,2126.07 H3.6 ; IC2.4@1650,2658.27 IC2.4 ; IC2.4@1675,2683.27 IC2.4 ; IC2.4@1790.55,2551.18 IC2.4 ; C1.2 2450,2616.14 2572.44,2738.58 SW2.1 SW2.3 SW2.3@3136.42,2738.58 ; IC1.8 2700,1558.07 C9.2@3167.13,1090.94 ; R7.1@3285.01,2932.87 R7.1 3285.01,2836.42 C11.2@3290.44,2830.99 ; C11.2@3292.16,2832.71 C11.2@3290.44,2830.99 ; H1.2 3350,2736.12 3352.46,2738.58 ; C10.2 3545.47,1090.94 C9.2 C9.2@3167.13,1090.94 ; LED2.1 3725,2033.66 J5.1 3831.5,2306.5 SW3.2 ; VR2.3 3850,1564.37 3949.75,1664.12 C6.2 3949.75,1685.88 3900,1735.63 3900,1950 3943.5,1993.5 SW3.4 SW3.2 ; SW1.3 SW1.1 3352.46,2738.58 ; SW3.2@4011.42,2311.42 SW3.2 ; C7.2 4025,2320.08 SW3.2 ; IC2.4 1225,2675 1100,2550 1100,1925.94 1100.47,1925.47 1100.47,1525.24 1100,1524.76 H2.1 1175,1025 1425,1025 H2.5 1575,1025 2425,1025 H2.15 2575,1025 3101.18,1025 C9.2@3167.13,1090.94 ; SW2.3@3136.42,2738.58 3352.46,2738.58 ; SW2.3@3136.42,2738.58 3222.83,2825 C11.2 C11.2@3295.24,2826.18 ; C11.2@3290.44,2830.99 3285.63,2826.18 C11.2@3295.24,2826.18 ; C11.2@3290.44,2830.99 C11.2@3295.24,2826.18
  Top Layer w20: J3.2 1650,2375 IC2.4@1650,2658.27 ; IC2.4@1675,2683.27 v3(1675,2975) ; IC2.4@1790.55,2551.18 C1.2
  Top Layer w100: Vin.1 1550,4593.12 v1(1550,4400) v1(1850,4400) ; v1(2300,4625) Q1.2@2300,4850
  Bottom Layer w10: H1.2 J5.1 ; C2.2 C2.2@3727.36,3627.36 ; R5.1@4237.64,3642.36 R5.1
  Bottom Layer w20: v3(1675,2975) 1675,4225 v1(1850,4400)
  Bottom Layer w100: Vin.1 1550,4593.12 v1(1550,4400) v1(1850,4400) ; v1(2300,4625) Q1.2@2300,4850
  Bottom Layer w150: 2200,4400 2456.25,4400 2506.25,4350 2918.75,4350 2968.75,4400 3225,4400 3475,4150 3475,3879.72 C2.2 ; C2.2@3727.36,3627.36 R5.1@4222.64,3627.36
  Bottom Layer w300: v1(1850,4400) 2200,4400 2300,4500 v1(2300,4625)
NetC1_1: C1.1 C3.1 F1.2 IC2.1 L1.2 R1.2 | length 2916.3
  Top Layer w10: 1275,3075 1325,3025 C3.1 ; F1.2 F1.2@1275,3346.46 ; 1550,3335.24 R1.2 ; L1.2@2719.88,3335.24 L1.2
  Top Layer w20: IC2.1 1275,3075 F1.2 ; C1.1 2450,3335.24
  Top Layer w300: F1.2 1550,3335.24 2450,3335.24 L1.2@2719.88,3335.24 ; L1.2@2725,3330.51 L1.2
NetC2_1: C2.1 D1.1 Vout.2 VR1.1 VR1.2 | length 3025.4
  Top Layer w10: C2.1 3804.92,3925 3950,3779.92 VR1.1 VR1.2
  Bottom Layer w150: D1.1 3000,4762.87 3087.87,4675 3300,4675 3725,4250 ; C2.1 3725,4250 ; Vout.2@4041.58,4729.69 4041.58,4566.58 3725,4250
NetC4_1: C4.1 C6.1 H2.2 H3.2 IC1.7 IC1.20 IC2.3 J3.1 R2.2 R9.2 VR2.1 | length 6433.4
  Top Layer w10: H2.2 1200,2175 1275,2250 ; 1275,2475 1375,2375 C4.1 ; J3.1 1550,1900 1700,1750 2500,1750 IC1.7 ; R2.2 IC1.7 ; IC1.20 2800,1850 IC1.7 ; VR2.1@4050.25,1350.25 VR2.1 4050,1674.75 C6.1 4050.25,1685.88 4100,1735.63 R9.2
  Top Layer w20: IC2.3 1275,2475 1275,2250 1400,2125 J3.1
  Bottom Layer w10: IC1.7 2675,1575 3825,1575 VR2.1 ; H3.2 2750,2125 2750,2000 IC1.20
NetC5_2: C5.2 IC1.21 | length 951.8
  Top Layer w10: C5.2 2575,1825 IC1.21
NetC7_1: C7.1 IC1.24 R4.2 | length 2017.9
  Top Layer w10: IC1.24 2400,2100 2725,2425 3950,2425 3978.57,2453.57 C7.1 R4.2
NetC9_1: C9.1 IC1.9 Y1.1 | length 695.7
  Top Layer w10: IC1.9 2800,1644.09 3094.09,1350 Y1.1 3175,1337.99 C9.1
NetC10_1: C10.1 IC1.10 Y1.2 | length 962.1
  Top Layer w10: IC1.10 3075,1475 3343.11,1475 3468.11,1350 Y1.2 3550,1337.01 C10.1
NetC11_1: C11.1 IC1.23 R3.2 R7.2 | length 2189.1
  Top Layer w10: R3.2 3225,3025 3296.43,3025 3357.84,2963.58 R7.2 C11.1@3357.84,2829.27 ; C11.1 C11.1@3357.84,2829.27 ; C11.1@3364.99,2836.42 C11.1@3357.84,2829.27
  Bottom Layer w10: IC1.23 2500,2087.97 2707.03,2295 2983.64,2295 3200.1,2511.46 3249.43,2511.46 3305.47,2567.5 3305.47,2694.53 3150,2850 R3.2 3162.5,3087.5 R3.2@3175,3100
NetD1_3: D1.3 L1.1 Q1.3 | length 2090.7
  Top Layer w100: Q1.3@2425,4850 v1(2725,4550)
  Top Layer w150: v1(2725,4550) 3075,4550 3200,4675 D1.3
  Top Layer w300: L1.1 v1(2725,4550)
  Bottom Layer w100: Q1.3@2425,4850 v1(2725,4550)
NetF1_1: F1.1 Vin.2 | length 536.2
  Top Layer w10: Vin.2@1214.08,4707.19 Vin.2 ; F1.1 F1.1@1277.66,4227.66
  Top Layer w100: Vin.2 1226.58,4273.42 F1.1
NetH1_1: H1.1 IC1.26 SW1.2 SW1.4 | length 2019.2
  Top Layer w10: IC1.26 2200,2075 2575,2450 3325,2450 H1.1 3554.92,2575 SW1.2 SW1.4
NetH1_3: H1.3 IC1.25 SW2.2 SW2.4 | length 1646
  Top Layer w10: SW2.2 SW2.4 3145.08,2575 H1.3
  Bottom Layer w10: IC1.25 2665,2315 2953.64,2315 3170.1,2531.46 3206.46,2531.46 H1.3
NetH2_3: H2.3 VR2.2 | length 2815.7
  Bottom Layer w10: H2.3 1375,1025 3625,1025 VR2.2
NetH2_4: H2.4 IC1.6 | length 1488.9
  Top Layer w10: H2.4 1500,1200 2325,1200 2500,1375 IC1.6
NetH2_6: H2.6 IC1.11 | length 1756.1
  Bottom Layer w10: H2.6 2044.53,1544.53 2044.53,1657.5 2112.03,1725 2925,1725 IC1.11
NetH2_11: H2.11 IC1.2 | length 550
  Bottom Layer w10: H2.11 IC1.2
NetH2_12: H2.12 IC1.3 | length 550
  Bottom Layer w10: H2.12 IC1.3
NetH2_13: H2.13 IC1.4 | length 550
  Bottom Layer w10: H2.13 IC1.4
NetH2_14: H2.14 IC1.5 | length 550
  Bottom Layer w10: H2.14 IC1.5
NetH2_16: H2.16 J2.1 | length 175
  Bottom Layer w10: H2.16 J2.1
NetH3_1: H3.1 IC1.18 | length 351.8
  Top Layer w10: H3.1 2775,2000 2950,2000 IC1.18
NetH3_3: H3.3 IC1.19 | length 166.4
  Bottom Layer w10: H3.3 2890.61,1984.39 2890.61,1959.39 IC1.19
NetH3_4: H3.4 IC1.17 | length 490.9
  Top Layer w10: H3.4 2807.5,2182.5 2844.53,2182.5 2881.56,2219.53 2918.44,2219.53 3100,2037.97 IC1.17 IC1.17@3093.44,1956.56
NetH3_5: H3.5 IC1.1 R9.1 SW3.1 SW3.3 | length 3172.2
  Top Layer w10: v2(4000,1900) 4085.43,1900 R9.1 4106.89,1885.43 4121.57,1900.12 4121.57,1921.57 4188.58,1988.58 SW3.3 SW3.1
  Bottom Layer w10: IC1.1 2000,1725 2050,1775 2387.97,1775 2555.47,1942.5 2555.47,2093.44 2712.03,2250 2800,2250 2850,2200 2850,2125 H3.5 3071.15,2075 3144.53,2001.62 3144.53,1942.5 3187.03,1900 v2(4000,1900)
NetIC1_15: IC1.15 J1.2 | length 125
  Bottom Layer w10: IC1.15 J1.2
NetIC1_16: IC1.16 R10.2 | length 258.2
  Top Layer w10: IC1.16 3275,2025 R10.2
NetJ1_1: J1.1 R8.2 | length 110.2
  Top Layer w10: R8.2@3300,2264.57 J1.1 J1.1@3314.57,2189.57
NetJ2_2: J2.2 R2.1 | length 226.9
  Top Layer w10: R2.1 2602.95,1325.2 2728.15,1200 J2.2
NetJ4_1: J4.1 LED1.2 R1.1 | length 339.6
  Top Layer w10: R1.1 LED1.2 J4.1
NetJ5_2: J5.2 LED2.2 R10.1 | length 312.2
  Top Layer w10: R10.1 LED2.2 3625,2033.66 J5.2
NetQ1_1: pad.10 pad.11 pad.13 Q1.1 R6.2 R8.1 | length 3616.4
  Top Layer w10: R6.2 pad.11 ; pad.10 2025,4675 Q1.1@2200,4850 ; pad.13 3253.54,2375 3293.11,2335.43 R8.1@3300,2335.43
  Bottom Layer w10: pad.10 pad.11 2312.5,2975 pad.13
NetR3_1: R3.1 VR1.3 | length 200
  Top Layer w10: R3.1 VR1.3
NetR4_1: R4.1 R5.2 Vout.1 | length 2188.9
  Top Layer w10: R4.1 4033.86,2612.99 4044.61,2623.74 4044.61,4144.61 R5.2@4225,4325 ; Vout.1@4240,4716.85 Vout.1 Vout.1@4242.16,4725.31
  Top Layer w150: R5.2 Vout.1@4240,4716.85
pads on no net: H2.7 H2.8 H2.9 H2.10 IC1.12 IC1.13 IC1.14 IC1.27 IC1.28

## Other copper
Top Layer:
  text "100 Watt Boost Converter" at 4415,1910 h60 r90
  text "Designed by / Bram Vanderwegen" at 1275,1225 h60

## Silkscreen, mask and mechanical layers (free items; w line width, h text height)
Top Overlay:
  text "-" at 1760,3980.01 h60
  text "+" at 1760,3725 h60
  text "-" at 3760,2105.01 h60
  text "5V" at 1385,2085 h60
  text "GND" at 1710,2085 h60
Dimensions:
  lines w10: 1005,1005 4495,1005 4495,4970 1005,4970 1005,1005

## Text inside footprints (layer, text, board x,y; h text height)
C1: Top Overlay "+" at 2575,3075 h48 r90
C2: Top Overlay "+" at 3750,4150 h59.06 r90
H3: Top Overlay "1" at 2620,2055 h50; Top Overlay "2" at 2600,2155 h50; Top Overlay "6" at 2960,2155 h50; Top Overlay "5" at 2960,2055 h50